# Altium PCB AIRCRAFT.PcbDoc (part 1 of 2)
Units mm, origin at the board's own origin, x right, y up, seen from the top; angles counter-clockwise.
Board outline 152.4 x 101.6 mm, 2 copper layers (Top Layer, Bottom Layer); 97 components, 77 nets, 515 pads, 0 vias.
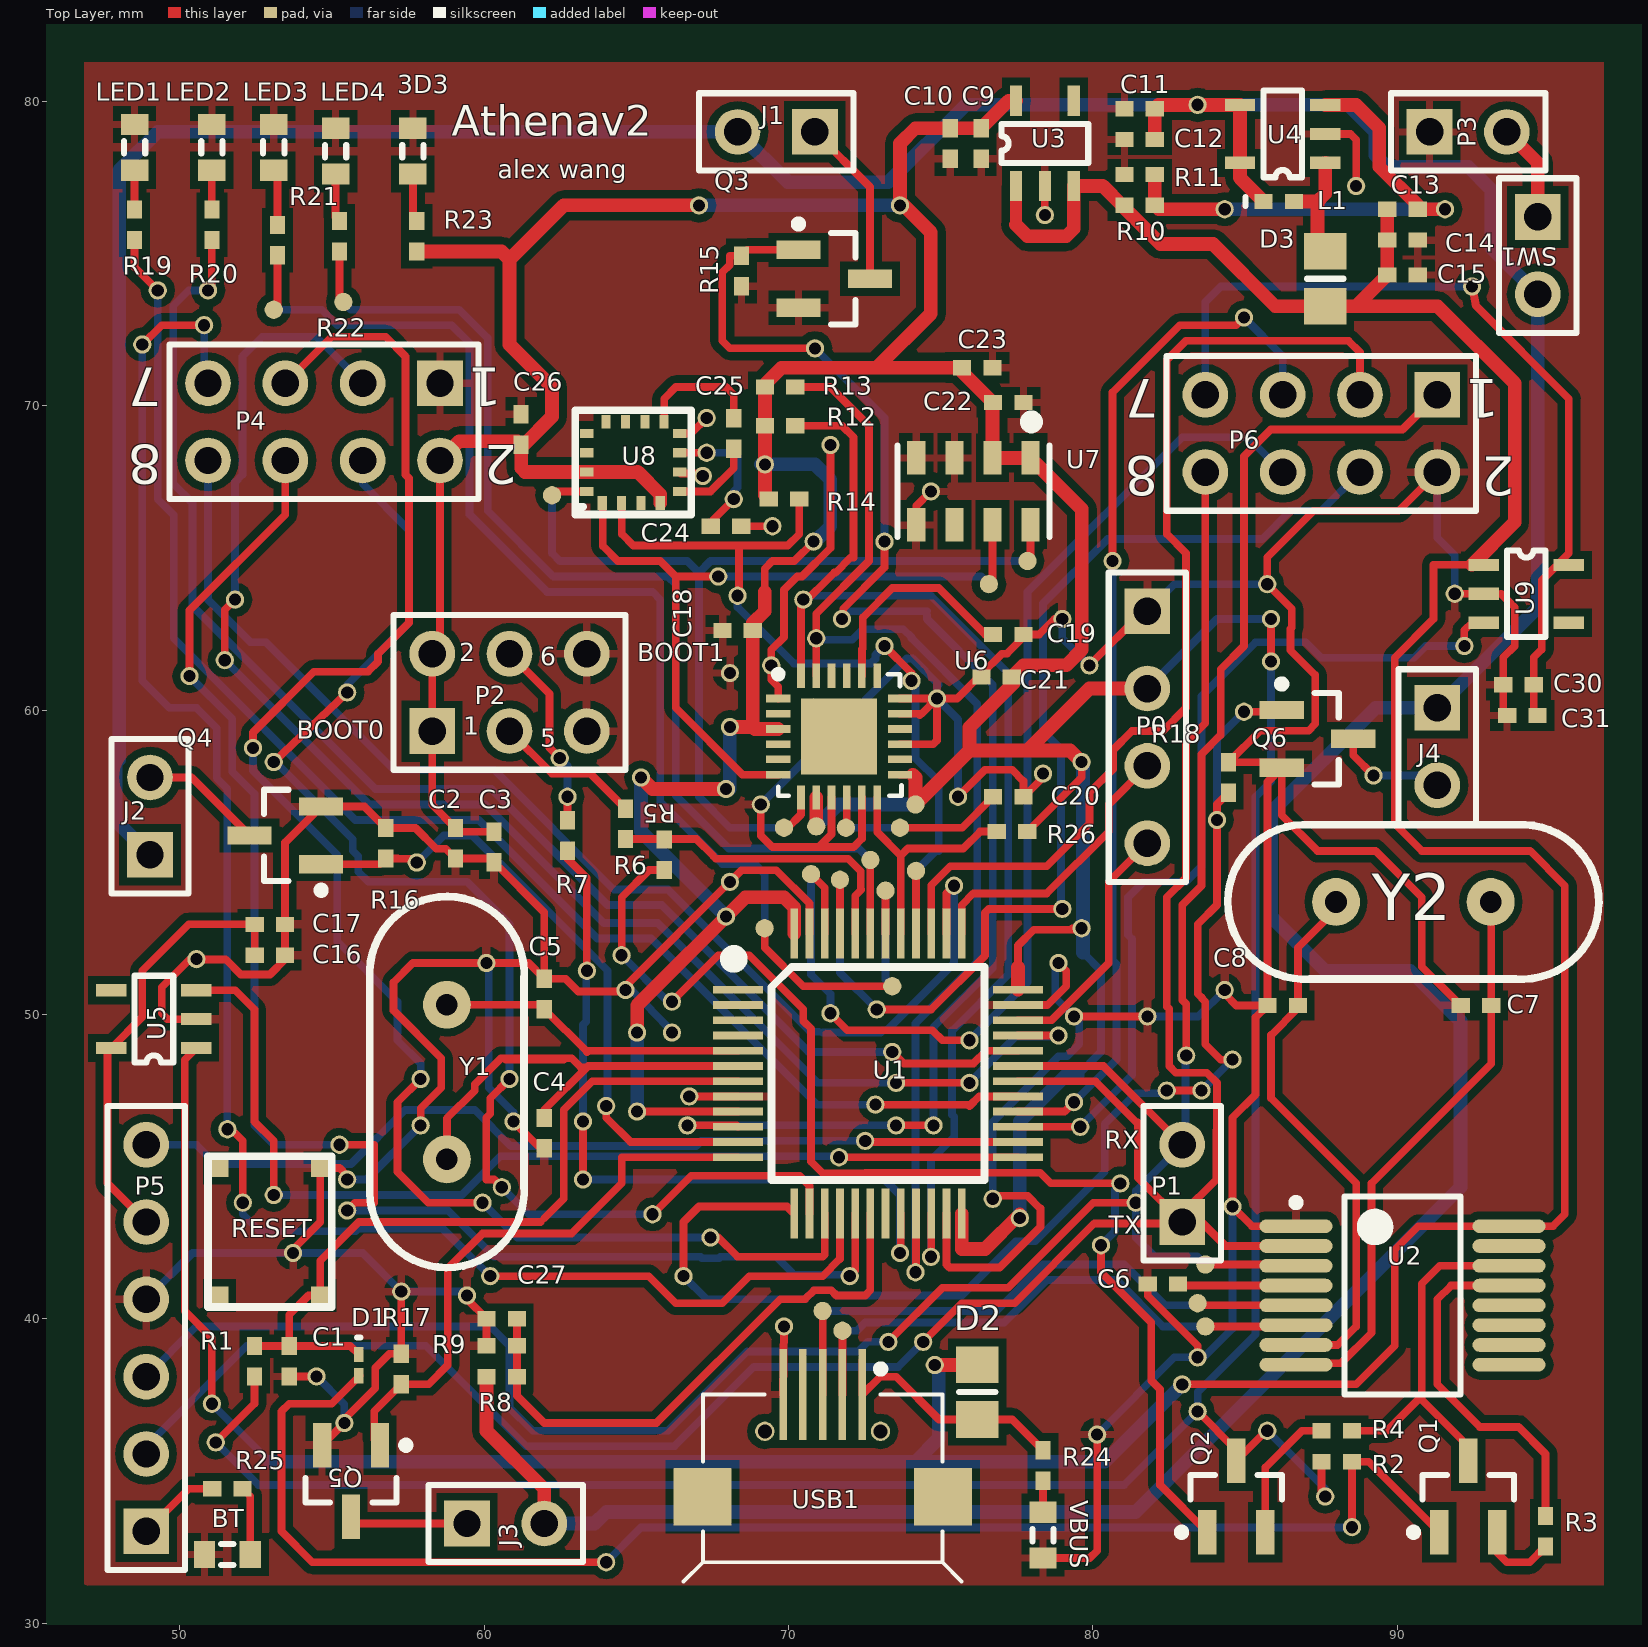
[diagram p0: Top Layer view]
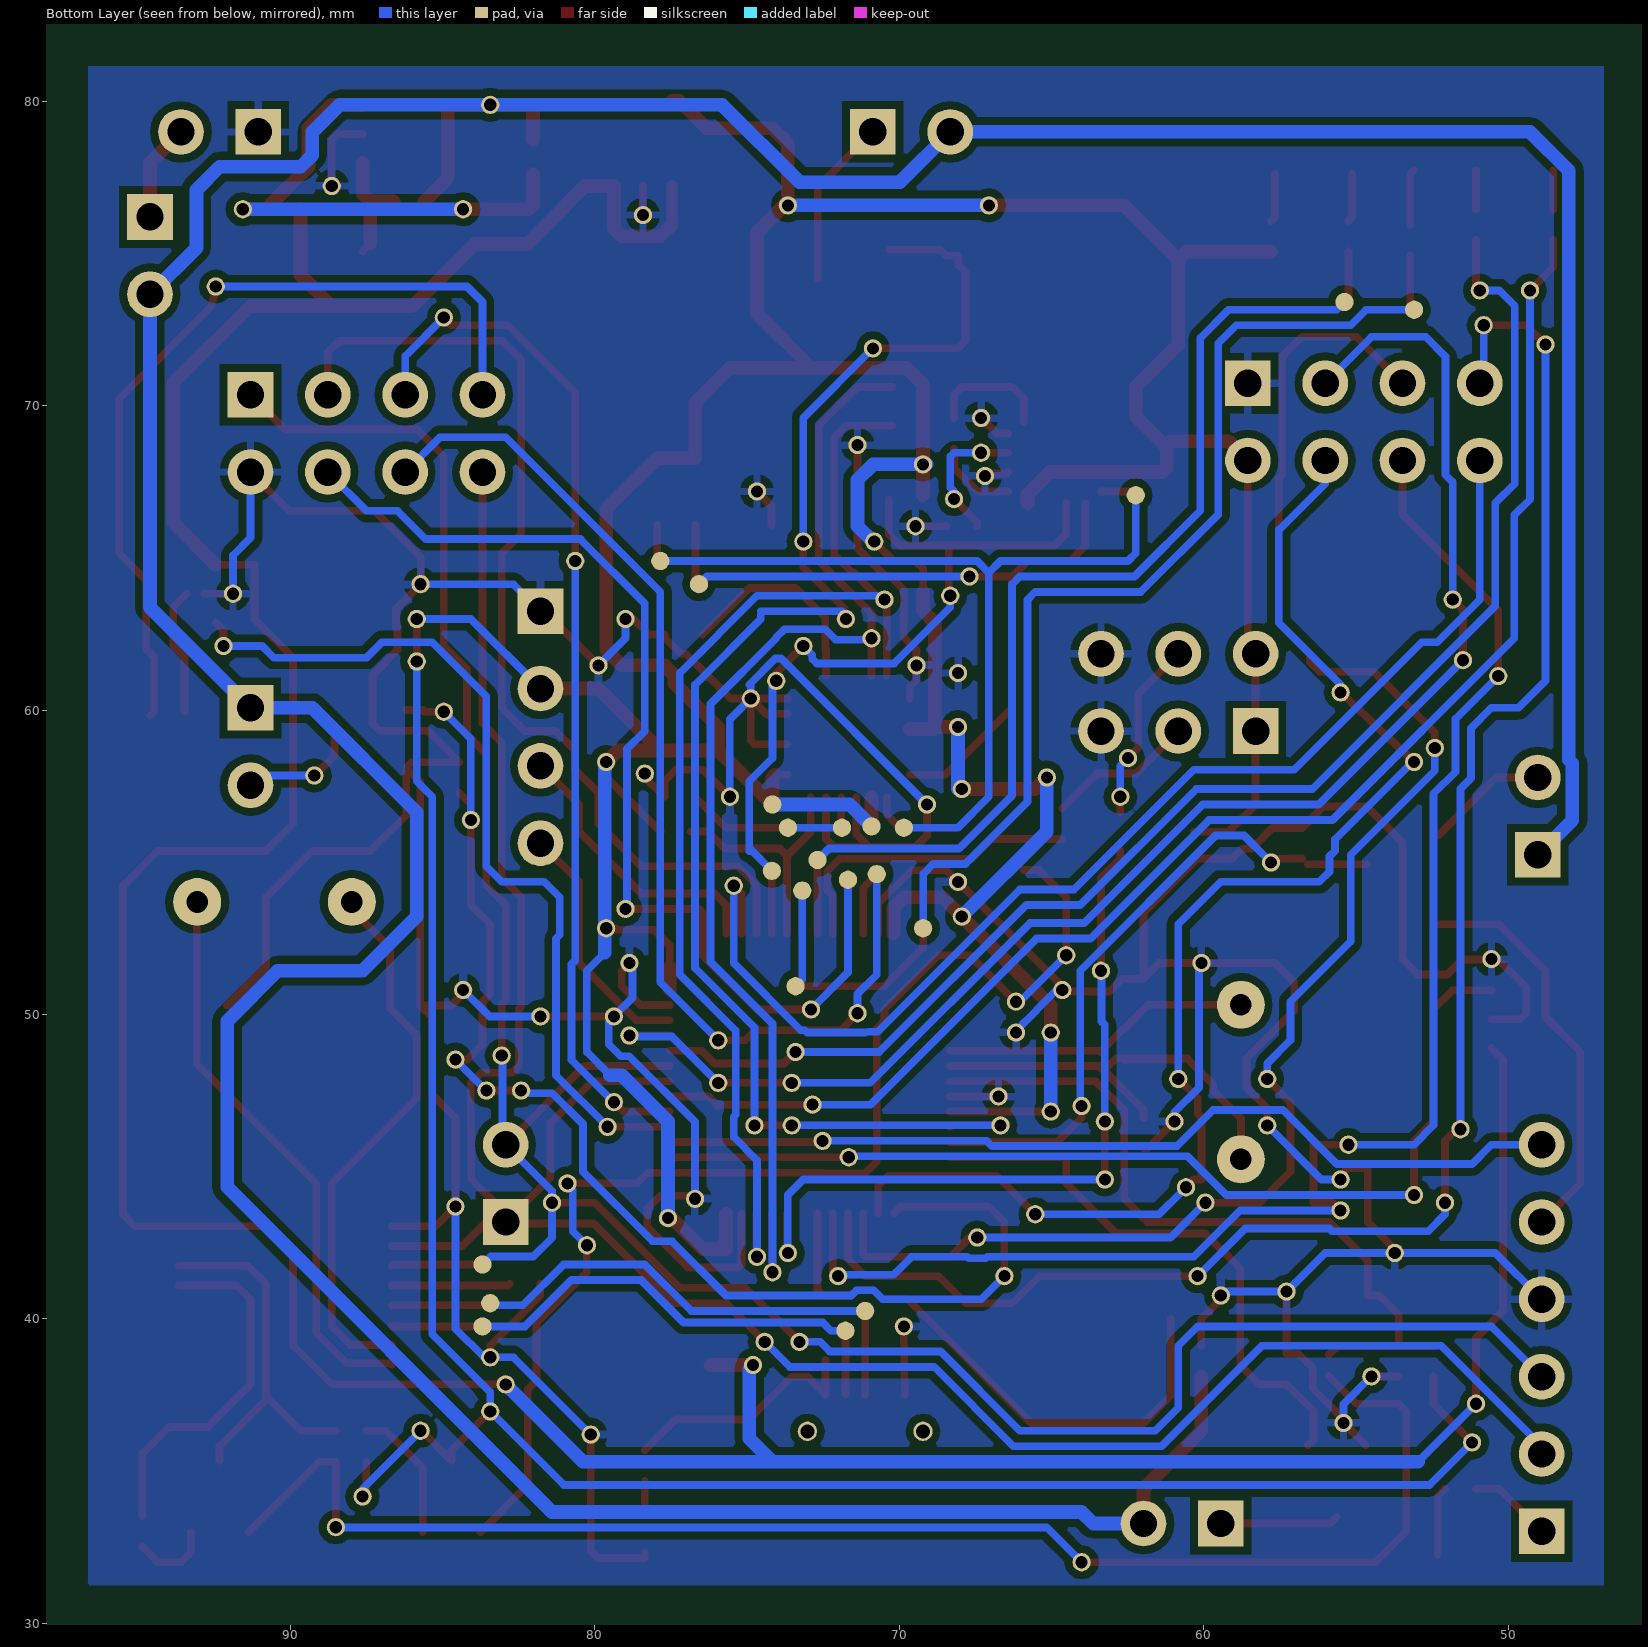
[diagram p1: Bottom Layer view, seen from below]

## Layer stack, top to bottom
Top Layer: signal copper 0.0356
Dielectric: dielectric 0.32, FR-4, Dk 4.8
Bottom Layer: signal copper 0.0356

## Board outline
25.4,25.4 177.8,25.4 177.8,127 25.4,127

## Design rules (kind name [scope] priority, off if disabled: settings)
Clearance [All] p1: gap=0.254
PolygonConnect [All] p1: connectstyle=Relief reliefconductorwidth=0.254 reliefentries=4 polygonreliefangle="90 Angle"
RoomDefinition 07_Wireless [InComponentClass('07_Wireless')] p1: confinementstyle=ConfineIn formatcopy=TRUE lockcomponents=FALSE outline 178.943,80.899 201.295,80.899 201.295,99.187 178.943,99.187
RoomDefinition 06_LEDs [InComponentClass('06_LEDs')] p2: confinementstyle=ConfineIn formatcopy=TRUE lockcomponents=FALSE outline 178.943,74.295 269.367,74.295 269.367,79.629 178.943,79.629
RoomDefinition 05_Motor [InComponentClass('05_Motor')] p3: confinementstyle=ConfineIn formatcopy=TRUE lockcomponents=FALSE outline 178.943,64.897 242.189,64.897 242.189,73.025 178.943,73.025
RoomDefinition 04_Sensor [InComponentClass('04_Sensor')] p4: confinementstyle=ConfineIn formatcopy=TRUE lockcomponents=FALSE outline 178.435,56.777 263.144,56.777 263.144,64.905 178.435,64.905
RoomDefinition 03_Power [InComponentClass('03_Power')] p5: confinementstyle=ConfineIn formatcopy=TRUE lockcomponents=FALSE outline 178.943,43.561 324.866,43.561 324.866,54.229 178.943,54.229
RoomDefinition 02_MCU [InComponentClass('02_MCU')] p6: confinementstyle=ConfineIn formatcopy=TRUE lockcomponents=FALSE outline 180.204,27.038 336.541,27.038 336.541,42.405 180.204,42.405
RoutingVias [All] p1: holewidth=0.711 width=1.27 viastyle="Through Hole" minholewidth=0.711 minwidth=1.27 maxholewidth=0.711 maxwidth=1.27
SilkscreenOverComponentPads [All] p1: minsilkscreentomaskgap=0.254
SolderMaskExpansion [All] p1: expansion=0.102
Width [All] p1: maxlimit=0.254 minlimit=0.254 preferedwidth=0.254
27 further rules are at their usual default settings.

## Classes and differential pairs
component class 07_Wireless: C26 P4 P5 P6
component class 06_LEDs: 3D3 BT LED1 LED2 LED3 LED4 R19 R20 R21 R22 R23 R24 R25 VBUS
component class 05_Motor: J1 J2 J3 J4 Q3 Q4 Q5 Q6 R15 R16 R17 R18
component class 04_Sensor: C18 C19 C20 C21 C22 C23 C24 C25 R12 R13 R14 R26 U6 U7 U8
component class 03_Power: C9 C10 C11 C12 C13 C14 C15 C16 C17 C27 C30 C31 D3 L1 P3 R8 R9 R10 R11 SW1 U3 U4 U5 U9
component class 02_MCU: C1 C2 C3 C4 C5 C6 C7 C8 D1 D2 P0 P1 P2 Q1 Q2 R1 R2 R3 R4 R5 R6 R7 RESET U1 U2 USB1 Y1 Y2

## Components (designator, comment, footprint, x,y, rotation, side; value= is the part's Value field where it differs from the comment)
3D3 "LED0" J1-0603 57.658,78.359 r90 top (schematic designator LED5)
BT "LED0" J1-0603 51.562,32.258 r180 top (schematic designator LED7)
C1 "Cap" 0402 53.594,38.608 r270 top
C2 "Cap" 0402 59.055,55.626 r270 top
C3 "Cap" 0402 60.325,55.499 r270 top
C4 "Cap" 0402 61.976,46.101 r270 top
C5 "Cap" 0402 61.976,50.673 r270 top
C6 "Cap" 0402 82.296,41.148 r0 top
C7 "Cap" 0402 92.583,50.292 r180 top
C8 "Cap" 0402 86.233,50.292 r0 top
C9 "Cap" 0402 76.327,78.613 r270 top
C10 "Cap" 0402 75.311,78.613 r270 top
C11 "Cap" 0402 81.534,79.756 r180 top
C12 "Cap" 0402 81.534,78.74 r180 top
C13 "Cap" 0402 90.17,76.454 r0 top
C14 "Cap" 0402 90.17,75.438 r0 top
C15 "Cap" 0402 90.17,74.295 r0 top
C16 "Cap" 0402 52.959,51.943 r0 top
C17 "Cap" 0402 52.959,52.959 r0 top
C18 "Cap" 0402 68.326,62.611 r180 top
C19 "Cap" 0402 77.216,62.484 r0 top
C20 "Cap" 0402 77.216,57.15 r180 top
C21 "Cap" 0402 76.835,61.087 r0 top
C22 "Cap" 0402 77.216,70.104 r180 top
C23 "Cap" 0402 76.2,71.247 r180 top
C24 "Cap" 0402 67.945,66.04 r180 top
C25 "Cap" 0402 68.199,69.088 r90 top
C26 "Cap" 0402 61.214,69.215 r270 top
C27 "Cap" 0402 60.579,40.005 r0 top
C30 "Cap" 0402 93.98,60.833 r180 top
C31 "Cap" 0402 94.107,59.817 r180 top
D1 "1N4148" 0603 55.88,38.481 r270 top
D2 "MBR0520" 6-0805_N 76.2,37.592 r90 top
D3 "MBR0520" 6-0805_N 87.63,74.168 r270 top
J1 "Header 2" HDR1X2 70.866,78.994 r180 top
J2 "Header 2" HDR1X2 49.022,55.245 r90 top
J3 "Header 2" HDR1X2 59.436,33.274 r0 top
J4 "Header 2" HDR1X2 91.313,60.071 r270 top
L1 "Inductor" 0402-A 86.106,76.708 r0 top
LED1 "LED0" J1-0603 48.514,78.486 r90 top
LED2 "LED0" J1-0603 51.054,78.486 r90 top
LED3 "LED0" J1-0603 53.086,78.486 r90 top
LED4 "LED0" J1-0603 55.118,78.359 r90 top
P0 "Header 4" HDR1X4 81.788,63.246 r270 top
P1 "Header 2" HDR1X2 82.931,43.18 r90 top
P2 "Header 3X2" HDR2X3 58.293,59.309 r0 top
P3 "battery" HDR1X2 91.059,78.994 r0 top
P4 "Header 4X2" HDR2X4 58.547,70.739 r180 top
P5 "Header 6" HDR1X6 48.895,33.02 r90 top
P6 "Header 4X2" HDR2X4 91.313,70.358 r180 top
Q1 "NPNS8050" SOT-23_M 92.329,34.163 r90 top
Q2 "PNPS8550" SOT-23_M 84.709,34.163 r90 top
Q3 "SI2302" SOT-23_M 71.501,74.168 r0 top
Q4 "SI2302" SOT-23_M 53.467,55.88 r180 top
Q5 "SI2302" SOT-23_M 55.626,34.671 r270 top
Q6 "SI2302" SOT-23_M 87.376,59.055 r0 top
R1 "Res3" 0402 52.451,38.608 r270 top
R2 "Res3" 0402 88.011,35.306 r180 top
R3 "Res3" 0402 94.869,33.02 r270 top
R4 "Res3" 0402 88.011,36.322 r180 top
R5 "Res3" 0402 65.913,55.245 r90 top
R6 "Res3" 0402 64.643,56.261 r270 top
R7 "Res3" 0402 62.738,55.88 r90 top
R8 "Res3" 0402 60.579,38.1 r0 top
R9 "Res3" 0402 60.579,39.116 r180 top
R10 "Res3" 0402 81.534,76.581 r180 top
R11 "Res3" 0402 81.534,77.597 r0 top
R12 "Res3" 0402 69.723,69.342 r180 top
R13 "Res3" 0402 69.723,70.612 r180 top
R14 "Res3" 0402 69.85,66.929 r180 top
R15 "Res3" 0402 68.453,74.422 r90 top
R16 "Res3" 0402 56.769,55.626 r270 top
R17 "Res3" 0402 57.277,38.354 r270 top
R18 "Res3" 0402 84.455,57.785 r270 top
R19 "Res3" 0402 48.514,75.946 r270 top
R20 "Res3" 0402 51.054,75.946 r270 top
R21 "Res3" 0402 53.213,75.438 r270 top
R22 "Res3" 0402 55.245,75.565 r270 top
R23 "Res3" 0402 57.785,75.565 r270 top
R24 "Res3" 0402 78.359,35.179 r90 top
R25 "Res3" 0402 51.562,34.417 r180 top
R26 "Res3" 0402 77.343,56.007 r180 top
RESET "SW-PB" SWFOOT 52.959,42.545 r180 top
SW1 "sw" HDR1X2 94.615,76.2 r270 top
U1 "STM32F103" LQFP48S 68.326,50.8 r0 top
U2 "CH340G" SSOP16_M 90.17,40.767 r0 top
U3 "MIC5205" SOT25-5 77.47,77.216 r90 top
U4 "LM27313" SOT25-5 87.63,77.978 r180 top
U5 "MIC5205" SOT25-5 50.546,48.895 r180 top
U6 "MPU6050" QFN24 73.66,58.928 r0 top
U7 "MS5611" "MS5611 - duplicate" 76.073,67.183 r270 top
U8 "HWC5883L" HMC5883L 64.77,68.072 r180 top
U9 "MIC5205" SOT25-5 92.837,64.77 r0 top
USB1 "Micro USB" Micro_USB 71.12,32.004 r270 top
VBUS "LED0" J1-0603 78.359,32.893 r270 top (schematic designator LED6)
Y1 "8MXTAL" XTAL2 58.928,48.006 r90 top
Y2 "12MXTAL" XTAL2 90.297,53.848 r180 top

## Footprints (in the part's own frame and the unit in brackets; to place one, negate y for a bottom-side part, rotate by r counter-clockwise, add the part's x,y. Pads: shape width x height; smd on the part's side, far side on the other; paste and mask are expansions set on the pad)
6-0805_N [mm] "Chip Resistor, Body 2.0x1.2mm, IPC Medium Density"
  rect 1.2x1.4 smd: 1(-0.9,0) 2(0.9,0)
  silkscreen extent 0,-0.6 0,0.6, body extent -1.07,-0.7 1.07,0.7, height 0.7
0402 [mm] "Chip Capacitor, Body 1.0x0.5mm, IPC High Density"
  rect 0.6x0.5 smd: 1(-0.5,0) 2(0.5,0)
  body extent -0.55,-0.3 0.55,0.3, height 1.3
0402-A [mm] "Chip Inductor, Body 1.0x0.5mm, IPC High Density"
  rect 0.6x0.5 smd: 1(-0.5,0) 2(0.5,0)
  silkscreen extent -1.1,-0.15 -1.1,0.15, body extent -0.55,-0.3 0.55,0.3, height 0.55
0603 [mm] "Chip Inductor, Body 0.6x0.3mm, IPC High Density"
  rect 0.5x0.3 smd: 1(-0.35,0) 2(0.35,0)
  silkscreen extent -0.9,-0.05 -0.9,0.05, body extent -0.33,-0.18 0.33,0.18, height 0.55
HDR1X2 [mm] "Connector; Header; 2 Position"
  rect 1.5x1.5 hole 0.9: 1(0,0)
  round 1.5 hole 0.9: 2(2.54,0)
  silkscreen extent -1.27,-1.27 3.81,1.27
HDR1X4 [mm] "Connector; Header; 4 Position"
  rect 1.5x1.5 hole 0.9: 1(0,0)
  round 1.5 hole 0.9: 2(2.54,0) 3(5.08,0) 4(7.62,0)
  silkscreen extent -1.27,-1.27 8.89,1.27
HDR1X6 [mm] "Connector; Header; 6 Position"
  rect 1.5x1.5 hole 0.9: 1(0,0)
  round 1.5 hole 0.9: 2(2.54,0) 3(5.08,0) 4(7.62,0) 5(10.16,0) 6(12.7,0)
  silkscreen extent -1.27,-1.27 13.97,1.27
HDR2X3 [mm] "Connector; Header; 3x2 Position"
  rect 1.5x1.5 hole 0.9: 1(0,0)
  round 1.5 hole 0.9: 2(0,2.54) 3(2.54,0) 4(2.54,2.54) 5(5.08,0) 6(5.08,2.54)
  silkscreen extent -1.27,-1.27 6.35,3.81
HDR2X4 [mm] "Connector; Header; 4x2 Position"
  rect 1.5x1.5 hole 0.9: 1(0,0)
  round 1.5 hole 0.9: 2(0,2.54) 3(2.54,0) 4(2.54,2.54) 5(5.08,0) 6(5.08,2.54) 7(7.62,0) 8(7.62,2.54)
  silkscreen extent -1.27,-1.27 8.89,3.81
HMC5883L [mm]
  rect 0.45x0.3 smd: 1(1.397,0.889) 2(1.397,0.254) 3(1.397,-0.381) 4(1.397,-1.016) 9(-1.651,-1.016) 10(-1.651,-0.381) 11(-1.651,0.254) 12(-1.651,0.889)
  rect 0.3x0.45 smd: 5(0.762,-1.397) 6(0.127,-1.397) 7(-0.508,-1.397) 8(-1.143,-1.397) 13(-1.016,1.27) 14(-0.381,1.27) 15(0.254,1.27) 16(0.889,1.27)
  silkscreen extent -2.03,-1.78 1.78,1.65
J1-0603 [mm] "Chip Resistor, Body 1.6x0.8mm, IPC High Density"
  rect 0.7x0.9 smd: 1(-0.75,0) 2(0.75,0)
  silkscreen extent -0.2,-0.35 0.2,0.35, body extent -0.85,-0.48 0.85,0.48, height 0.9
LQFP48S [mil] "DPIN-0.5"
  rect 65x10 smd: 1(0.42,0.29) 2(0.42,-19.39) 3(0.42,-39.08) 4(0.42,-58.76) 5(0.42,-78.45) 6(0.42,-98.13) 7(0.42,-117.82) 8(0.42,-137.5) 9(0.42,-157.19) 10(0.42,-176.87) 11(0.42,-196.56) 12(0.42,-216.24) 25(362.63,-216.24) 26(362.63,-196.56) 27(362.63,-176.87) 28(362.63,-157.19) 29(362.63,-137.5) 30(362.63,-117.82) 31(362.63,-98.13) 32(362.63,-78.45) 33(362.63,-58.76) 34(362.63,-39.08) 35(362.63,-19.39) 36(362.63,0.29)
  rect 10x65 smd: 13(73.26,-289.08) 14(92.94,-289.08) 15(112.63,-289.08) 16(132.31,-289.08) 17(152,-289.08) 18(171.68,-289.08) 19(191.37,-289.08) 20(211.05,-289.08) 21(230.74,-289.08) 22(250.42,-289.08) 23(270.11,-289.08) 24(289.79,-289.08) 37(289.79,73.13) 38(270.11,73.13) 39(250.42,73.13) 40(230.74,73.13) 41(211.05,73.13) 42(191.37,73.13) 43(171.68,73.13) 44(152,73.13) 45(132.31,73.13) 46(112.63,73.13) 47(92.94,73.13) 48(73.26,73.13)
  silkscreen extent -10,-246 319,46
Micro_USB [mm] "5P Мщ?"
  rect 3x0.25 smd: 1(-5.508,1.3) 2(-5.508,0.65) 3(-5.508,0) 4(-5.508,-0.65) 5(-5.508,-1.3)
  round 0.635 hole 0.457 unplated: MH1(-4.3,1.9) MH2(-4.3,-1.9)
  rect 1.9x1.9 smd: ""(-2.15,3.95) ""(-2.15,-3.95)
  silkscreen extent -6.47,-4.57 0.63,4.57
"MS5611 - duplicate" [mm]
  rect 1.1x0.6 smd: 1(-1.1,1.875) 2(-1.1,0.625) 3(-1.1,-0.625) 4(-1.1,-1.875) 5(1.1,-1.875) 6(1.1,-0.625) 7(1.1,0.625) 8(1.1,1.875)
  silkscreen extent -2.41,-2.5 1.5,2.5
QFN24 [mm] "QFN24"
  rect 0.8x0.25 smd: 1(-4,1.45) 2(-4,0.95) 3(-4,0.45) 4(-4,-0.05) 5(-4,-0.55) 6(-4,-1.05) 13(0,-1.05) 14(0,-0.55) 15(0,-0.05) 16(0,0.45) 17(0,0.95) 18(0,1.45)
  rect 0.25x0.8 smd: 7(-3.25,-1.8) 8(-2.75,-1.8) 9(-2.25,-1.8) 10(-1.75,-1.8) 11(-1.25,-1.8) 12(-0.75,-1.8) 19(-0.75,2.2) 20(-1.25,2.2) 21(-1.75,2.2) 22(-2.25,2.2) 23(-2.75,2.2) 24(-3.25,2.2)
  rect 2.5x2.5 smd: 25(-2,0.2)
  silkscreen extent -4.11,-1.75 0.05,2.36
SOT25-5 [mm]
  rect 1x0.4 smd: 1(0,0) 2(0,-0.95) 3(0,-1.9) 4(2.8,-1.9) 5(2.8,0)
  silkscreen extent 0.76,-2.38 2.03,0.48
SOT-23_M [mm] "SOT23, 3-Leads, Body 2.9x1.3mm, Pitch 0.95mm, Lead Span 2.5mm, IPC Low Density"
  rect 1.45x0.6 smd: 1(-1.175,0.95) 2(-1.175,-0.95) 3(1.175,0)
  silkscreen extent -1.3,-1.5 0.7,1.92, body extent -0.7,-1.5 0.7,1.5, height 1.1
SSOP16_M [mm] "SOP, 16-Leads, Body 6.2x5.3mm, Pitch 0.65mm, IPC Low Density"
  oval 2.4x0.45 smd: 1(-3.5,2.275) 2(-3.5,1.625) 3(-3.5,0.975) 4(-3.5,0.325) 5(-3.5,-0.325) 6(-3.5,-0.975) 7(-3.5,-1.625) 8(-3.5,-2.275) 9(3.5,-2.275) 10(3.5,-1.625) 11(3.5,-0.975) 12(3.5,-0.325) 13(3.5,0.325) 14(3.5,0.975) 15(3.5,1.625) 16(3.5,2.275)
  silkscreen extent -3.62,-3.25 1.9,3.25, body extent -2.7,-3.25 2.7,3.25, height 2
SWFOOT [mm]
  rect 0.6x0.6 smd: 1(-1.651,1.778) 2(-1.651,-2.413) 3(1.651,-2.413) 4(1.651,1.778)
  silkscreen extent -2.03,-2.79 2.03,2.16
XTAL2 [mil]
  round 62 hole 28: 1(91,6) 2(-109,6)
  silkscreen extent -249,-94 231,106

## Part data
3D3 BT LED1 LED2 LED3 LED4 VBUS: "Typical INFRARED GaAs LED"
C1 C2 C3 C4 C5 C6 C7 C8 C9 C10 C11 C12 C13 C14 C15 C16 C17 C18 C19 C20 C21 C22 C23 C24 C25 C26 C27 C30 C31: "Capacitor"
D1: library part "Diode 1N4148", "High Conductance Fast Diode"
D2 D3: library part "D Zener", "Zener Diode"
J1 J2 J3 J4 P1: "Header, 2-Pin"
P0: "Header, 4-Pin"
P2: "Header, 3-Pin, Dual row"
P3 SW1: library part "Header 2", "Header, 2-Pin"
P4 P6: "Header, 4-Pin, Dual row"
P5: "Header, 6-Pin"
Q1: library part NPN, "NPN Bipolar Transistor"
Q2: library part PNP, "PNP Bipolar Transistor"
R1 R2 R3 R4 R5 R6 R7 R8 R9 R10 R11 R12 R13 R14 R15 R16 R17 R18 R19 R20 R21 R22 R23 R24 R25 R26: "Resistor"
RESET: "Switch"
U8: library part HMC5883L
Y1 Y2: library part XTAL, "Crystal Oscillator"

## Free pads (board coordinates)
  round 0.6 hole 0.4: 0(67.31,68.453) 0(79.629,58.293) 0(80.264,42.418) 1(68.199,66.929) 1(79.629,52.832) 1(80.899,44.45) 1(83.439,79.883) 2(64.516,51.943) 2(69.469,66.04) 2(88.646,77.216) 3(66.167,50.419) 3(69.223,68.072) 3(73.406,48.768) 3(91.567,76.454) 4(70.822,65.532) 4(78.867,49.307) 4(84.328,76.454) 4(85.725,36.322) 5(67.691,64.389) 5(75.946,47.752) 5(78.42,76.261) 5(87.63,34.163) 6(68.326,63.754) 6(73.533,47.752) 6(85.852,62.992) 6(92.456,73.914) 7(51.479,61.639) 7(67.056,76.581) 7(69.088,56.896) 7(89.218,57.848) 8(51.816,63.627) 8(73.66,76.581) 8(85.852,61.595) 9(50.927,73.787) 9(67.183,67.691) 9(83.439,36.957) 10(67.31,69.596) 10(88.511,33.155) 11(70.866,71.882) 11(72.852,47.036) 12(49.276,73.787) 12(64.008,32.004) 12(73.152,65.532) 13(51.181,35.941) 13(70.485,63.627) 13(79.375,47.117) 14(70.91,62.357) 14(80.645,64.897) 15(71.755,62.992) 15(83.439,38.735) 16(75.438,54.229) 16(84.963,72.898) 17(79.581,46.307) 18(68.072,54.356) 18(92.202,62.103) 19(74.041,60.96) 19(83.063,48.646) 20(62.738,57.15) 21(62.484,58.42) 21(73.152,62.103) 22(78.867,51.689) 22(84.582,48.514) 23(66.738,47.307) 23(72.898,50.165) 23(78.359,57.912) 24(66.675,46.355) 24(71.374,50.038) 25(77.597,43.307) 25(84.074,56.388) 26(74.759,46.355) 26(76.708,43.942) 26(84.963,59.944) 27(74.676,42.037) 27(85.725,64.135) 28(73.533,46.355) 28(74.168,41.529) 28(78.994,62.992) 29(72.517,45.847) 29(75.946,49.149) 29(79.883,61.468) 30(71.66,45.307) 30(78.994,53.467) 30(84.582,43.688) 31(53.086,44.069) 31(55.406,36.576) 32(54.491,38.108) 32(65.024,49.403) 33(71.374,68.707) 34(60.96,46.482) 34(65.024,46.807) 36(64.643,50.8) 37(79.375,49.935) 38(73.66,42.164) 38(81.788,49.935) 39(63.246,44.577) 39(83.566,47.498) 40(63.246,46.482) 40(82.423,47.498) 41(63.373,51.435) 41(84.328,50.8) 42(68.072,59.444) 42(80.137,36.195) 43(67.945,57.404) 43(69.85,39.751) 44(50.546,51.816) 44(65.151,57.785) 45(59.436,40.767) 45(67.945,53.213) 46(57.277,40.894) 46(64.008,46.99) 47(53.721,42.164) 47(57.785,54.991) 48(60.071,51.689) 48(72.009,41.402) 49(55.499,44.577) 49(65.532,43.434) 50(57.912,46.355) 50(60.579,44.323) 51(60.833,47.879) 52(53.086,58.293) 52(66.167,49.403) 53(55.499,60.579) 54(67.437,42.672) 55(59.944,43.815) 56(57.912,47.879) 57(52.405,58.755) 58(55.499,43.561) 59(55.245,45.72) 60(50.32,61.115) 61(60.198,41.402) 62(52.07,43.815) 63(51.562,46.228) 64(48.768,72.009) 65(50.8,72.644) 66(66.548,41.402) 68(82.931,37.846) 69(74.803,38.481) 70(73.279,39.243) 71(81.407,43.815) 72(74.422,39.243) 73(51.054,37.211) 75(91.887,63.82) 76(74.877,60.378) 77(74.676,67.183) 78(75.565,57.15) 80(68.072,61.214) 81(69.432,61.468)
  round 0.6 all layers, no hole: 0(83.693,41.783) 1(83.439,40.513) 2(71.12,40.259) 3(71.77,39.609) 4(83.693,39.751) 7(69.85,56.134) 8(62.23,67.056) 9(77.851,64.897) 10(76.581,64.135) 11(70.739,54.61) 13(71.687,54.424) 14(70.91,56.178) 15(71.882,56.134) 16(73.66,56.134) 17(74.168,56.896) 18(74.187,54.718) 19(72.687,55.075) 21(73.187,54.067) 22(55.372,73.406) 23(73.406,50.927) 24(69.215,52.832) 25(53.086,73.152)

## Nets (pads, with @x,y where several pads share a name; then routed paths per layer and width w, separated by ;. In a path a pad name is that pad's centre, name@x,y a point inside that pad or via, vN(x,y) a via of type N, cw(c..) or ccw(c..) an arc to the next point about the centre after c; other vN are vias at no path point)
BAT_DET: C27.2 R8.2 R9.1 U1.18 | length 19
  Top Layer w0.254: C27.2@61.079,40.005 R8.2@61.079,38.1 61.079,37.473 61.976,36.576 65.659,36.576 69.723,40.64 70.538,40.64 70.838,40.94 71.402,40.94 71.575,40.767 72.517,40.767 72.687,40.937 U1.18@72.687,43.457
BOOT0: R5.2 R6.2 U1.44 | length 10.2
  Top Layer w0.254: R6.2@64.643,55.761 65.913,55.761 66.974,55.761 67.527,55.208 ; 67.617,55.118 71.956,55.118 72.368,54.706 72.368,54.124 72.39,54.102 72.187,53.899 U1.44@72.187,52.657
BOOT1: pad.38@73.66,42.164 pad.39@63.246,44.577 pad.40@63.246,46.482 pad.41@63.373,51.435 R7.1 U1.20 | length 24.9
  Top Layer w0.254: R7.1@62.738,55.38 62.738,55.118 63.373,54.483 pad.41@63.373,51.435 ; pad.39@63.246,44.577 pad.40@63.246,46.482 ; pad.38@73.687,42.191 U1.20@73.687,43.457
  Bottom Layer w0.254: pad.39@63.246,44.577 73.152,44.577 73.66,44.069 pad.38@73.66,42.164 ; pad.40@63.246,46.482 63.246,49.657 63.355,49.766 pad.41@63.355,51.417
BT_EN: pad.30@71.66,45.307 pad.31@53.086,44.069 U1.25 U5.3 | length 33.5
  Top Layer w0.254: U5.3@50.546,50.795 51.821,50.795 52.451,50.165 52.451,46.482 53.086,45.847 pad.31@53.086,44.069 ; pad.30@71.66,45.307 U1.25@77.537,45.307
  Bottom Layer w0.254: pad.31@53.086,44.069 59.26,44.069 60.53,45.339 pad.30@71.628,45.339
DN: pad.3@71.77,39.609 pad.4@83.693,39.751 U2.6 USB1.2 | length 18.3
  Top Layer w0.254: USB1.2@71.77,37.512 pad.3@71.77,39.609 ; pad.4@83.693,39.751 86.629,39.751 U2.6@86.67,39.792
  Bottom Layer w0.254: pad.3@71.77,39.609 72.248,39.609 72.517,39.878 77.089,39.878 78.486,41.275 80.772,41.275 82.296,39.751 pad.4@83.693,39.751
DP: pad.1@83.439,40.513 pad.2@71.12,40.259 U2.5 USB1.3 | length 19.6
  Top Layer w0.254: USB1.3@71.12,37.512 pad.2@71.12,40.386 ; pad.1@83.439,40.442 U2.5@86.67,40.442
  Bottom Layer w0.254: pad.2@71.12,40.259 76.835,40.259 78.359,41.783 81.026,41.783 82.367,40.442 pad.1@83.439,40.442
DTR: R3.1 U2.13 | length 11.9
  Top Layer w0.254: U2.13@93.67,41.092 91.765,41.092 91.313,40.64 91.313,37.846 92.71,36.449 93.98,36.449 94.869,35.56 R3.1@94.869,33.52
GND: 3D3.2 BT.2 C1.2 C2.2 C3.2 C4.2 C5.1 C6.1 C7.2 C8.1 C9.2 C10.2 C11.2 C12.2 C14.2 C15.2 C16.2 C17.2 C18.2 C19.2 C20.1 C21.1 C22.1 C23.1 C24.1 C26.1 C27.1 C30.2 C31.2 LED1.2 LED2.2 LED3.2 LED4.2 P0.1 P2.5 P2.6 P3.1 P4.1 P5.4 P6.2 pad.2@69.469,66.04 pad.2@88.646,77.216 pad.5@78.42,76.261 pad.7@69.088,56.896 pad.9@67.183,67.691 pad.10@67.31,69.596 pad.15@83.439,38.735 pad.18@68.072,54.356 pad.22@78.867,51.689 pad.23@66.738,47.307 pad.23@78.359,57.912 pad.26@76.708,43.942 pad.27@85.725,64.135 pad.28@78.994,62.992 pad.29@79.883,61.468 pad.30@84.582,43.688 pad.31@55.406,36.576 pad.32@54.491,38.108 pad.33 pad.34@60.96,46.482 pad.36 pad.37 pad.38@81.788,49.935 pad.41@84.328,50.8 pad.42@80.137,36.195 pad.43@69.85,39.751 pad.44@50.546,51.816 pad.45@59.436,40.767 pad.46@57.277,40.894 pad.47@53.721,42.164 pad.48@60.071,51.689 pad.49@55.499,44.577 pad.50@57.912,46.355 pad.52@66.167,49.403 pad.75 pad.76 pad.77 pad.78 pad.80 pad.81 Q3.2 Q4.2 Q5.2 Q6.2 R9.2 R11.1 R15.1 R16.1 R17.1 R18.1 RESET.2 U1.8 U1.23 U1.35 U1.47 U2.1 U3.2 U4.2 U5.2 U6.1 U6.9 U6.11 U6.15 U6.17 U6.18 U7.3 U7.4 U7.5 U8.9 U8.11 U9.2 USB1.5 VBUS.2 | length 252.3
  Top Layer w0.254: U5.2@50.546,49.845 49.596,49.845 49.403,50.038 49.403,50.891 50.328,51.816 pad.44@50.546,51.816 50.554,51.808 51.505,51.808 52.001,51.312 52.963,51.312 53.459,51.808 C16.2@53.459,51.943 C17.2@53.459,52.959 53.459,55.647 Q4.2@54.642,56.83 56.065,56.83 R16.1@56.769,56.126 57.743,56.126 58.424,55.445 58.736,55.445 C2.2@59.055,55.126 60.198,55.126 C3.2@60.325,54.999 61.976,53.348 C5.1@61.976,51.173 ; C1.2@53.594,38.108 pad.32@54.491,38.108 ; pad.47@53.721,42.164 53.721,42.291 54.61,43.18 RESET.2@54.61,44.958 55.245,44.958 55.499,44.704 pad.49@55.499,44.577 ; Q5.2@54.676,35.846 pad.31@55.406,36.576 55.406,36.701 56.419,37.714 56.419,38.385 56.888,38.854 R17.1@57.277,38.854 pad.46@57.277,40.894 ; pad.50@57.912,46.355 57.912,46.916 58.593,47.597 58.593,48.56 57.023,50.13 57.023,51.054 57.658,51.689 pad.48@60.071,51.689 61.46,51.689 C5.1@61.976,51.173 ; pad.45@59.436,40.767 59.436,40.648 C27.1@60.079,40.005 R9.2@60.079,39.116 ; pad.34@60.96,46.482 61.841,45.601 C4.2@61.976,45.601 ; U8.11@66.421,67.818 66.467,67.772 67.102,67.772 pad.9@67.183,67.691 ; U8.9@66.421,69.088 66.802,69.088 pad.10@67.31,69.596 ; pad.23@66.738,47.307 U1.8@68.337,47.307 ; C24.1@68.445,66.04 pad.2@69.469,66.04 ; pad.7@69.088,56.642 69.088,55.88 69.469,55.499 70.993,55.499 ; U6.1@69.66,60.378 69.66,60.769 69.432,60.997 69.432,61.976 69.85,62.394 69.85,63.955 70.284,64.389 70.441,64.389 71.374,65.322 pad.33@71.374,68.707 ; USB1.5@69.82,37.512 pad.43@69.85,39.751 pad.43@69.85,39.497 ; U1.47@70.687,52.657 70.687,53.646 69.596,54.737 68.453,54.737 pad.18@68.072,54.356 64.643,50.927 pad.36@64.643,50.8 64.597,50.754 63.091,50.754 62.672,51.173 C5.1@61.976,51.173 ; U6.9@71.41,57.128 71.41,55.916 70.993,55.499 ; U6.11@72.41,57.128 72.41,55.773 72.136,55.499 70.993,55.499 ; U6.15@73.66,58.878 74.753,58.878 74.877,59.002 pad.76@74.877,60.378 ; U6.17@73.66,59.878 74.274,59.878 ; U6.18@73.66,60.378 pad.76@74.877,60.378 ; U7.5@74.198,66.083 74.198,66.705 pad.77@74.676,67.183 ; 74.314,59.838 74.274,59.878 ; U1.23@75.187,43.457 75.187,41.786 75.288,41.685 76.938,41.685 78.278,43.025 78.278,43.633 78.255,43.633 77.848,44.04 76.806,44.04 pad.26@76.708,43.942 ; pad.78@75.565,57.15 76.454,58.039 77.343,58.039 77.716,57.666 C20.1@77.716,57.15 77.724,57.15 pad.23@78.486,57.912 ; C21.1@76.335,61.087 C21.1@76.335,61.176 ; U1.35@77.537,50.307 78.501,50.307 79.121,50.927 79.121,51.435 pad.22@78.867,51.689 ; VBUS.2@78.359,32.304 VBUS.2@78.359,32.143 79.895,32.143 80.137,32.385 pad.42@80.137,36.195 ; pad.5@78.42,76.261 U3.2@78.42,77.216 ; pad.28@78.74,62.992 78.232,62.484 C19.2@77.716,62.484 77.716,62.395 77.174,61.853 77.012,61.853 C21.1@76.335,61.176 ; pad.37@79.375,49.935 pad.38@81.788,49.935 ; pad.29@79.883,61.468 81.661,63.246 P0.1@81.788,63.246 ; C6.1@81.796,41.148 81.796,40.759 83.439,39.116 pad.15@83.439,38.735 ; pad.41@84.328,50.8 84.328,50.673 84.709,50.292 C8.1@85.733,50.292 ; U2.1@86.67,43.042 85.228,43.042 pad.30@84.582,43.688 84.582,46.609 85.344,47.371 85.344,49.903 C8.1@85.733,50.292 ; U4.2@87.63,78.928 88.458,78.928 88.646,78.74 pad.2@88.646,77.216 ; P6.2@91.313,67.818 90.043,66.548 87.249,66.548 85.725,65.024 pad.27@85.725,64.135 86.533,63.327 86.533,62.71 86.487,62.664 86.487,61.969 87.307,61.149 87.307,59.547 87.084,59.324 85.494,59.324 R18.1@84.455,58.285 86.021,58.285 Q6.2@86.201,58.105 ; pad.75@91.887,63.82 U9.2@92.837,63.82 ; C7.2@92.083,50.292 90.805,51.57 90.805,53.848 89.281,55.372 87.376,55.372 86.201,56.547 Q6.2@86.201,58.105 ; 93.406,63.82 93.853,63.373 93.853,62.103 93.48,61.73 C30.2@93.48,60.833 C31.2@93.48,59.944 ; 74.274,59.878 74.377,59.878 pad.76@74.877,60.378 ; pad.76@74.877,60.378 75.537,60.378 C21.1@76.335,61.176 ; C8.1@85.733,50.292 85.733,57.637 Q6.2@86.201,58.105
  Bottom Layer w0.254: P5.4@48.895,40.64 50.419,42.164 pad.47@53.721,42.164 56.007,42.164 pad.46@57.277,40.894 59.309,40.894 pad.45@59.436,40.767 ; pad.32@54.491,38.108 55.406,37.193 pad.31@55.406,36.576 ; pad.49@55.499,44.577 56.134,44.577 pad.50@57.912,46.355 ; pad.48@60.071,51.689 60.152,51.608 60.152,47.597 60.96,46.789 pad.34@60.96,46.482 ; pad.36@64.643,50.8 64.844,50.8 65.486,50.158 65.486,50.137 66.167,49.456 pad.52@66.167,49.403 ; pad.7@69.088,56.896 73.884,61.692 74.071,61.692 74.93,60.833 ; 74.877,60.803 pad.76@74.877,60.378 75.565,59.69 pad.78@75.565,57.15 ; pad.26@76.708,43.942 76.708,46.467 78.867,48.626 79.149,48.626 79.548,49.025 79.548,49.762 pad.37@79.375,49.935 78.764,50.546 78.764,51.586 pad.22@78.867,51.689 ; pad.28@78.994,62.992 78.994,62.357 pad.29@79.883,61.468 ; pad.42@80.137,36.195 82.677,38.735 pad.15@83.439,38.735 83.64,38.735 84.582,39.677 pad.30@84.582,43.688 ; pad.38@81.788,49.935 83.463,49.935 pad.41@84.328,50.8 ; P0.1@81.788,63.246 82.677,64.135 pad.27@85.725,64.135 ; P6.2@91.313,67.818 91.313,65.659 91.887,65.085 pad.75@91.887,63.82
HW_INT: pad.6@68.326,63.754 pad.18@74.187,54.718 pad.19@74.041,60.96 pad.21@73.152,62.103 R14.1 U1.40 U8.15 | length 26.5
  Top Layer w0.254: U8.15@64.516,66.802 64.516,65.786 64.897,65.405 69.977,65.405 70.35,65.778 R14.1@70.35,66.929 ; pad.6@68.326,63.754 68.372,63.8 68.372,65.324 ; pad.21@73.152,62.103 74.041,61.214 pad.19@74.041,60.96 ; pad.18@74.168,54.737 pad.18@74.187,54.718 U1.40@74.187,52.657
  Bottom Layer w0.254: pad.6@68.326,63.754 68.326,63.373 70.168,61.531 72.707,61.531 72.856,61.68 72.856,61.807 pad.21@73.152,62.103 ; pad.19@74.168,60.793 74.168,58.42 74.93,57.658 74.93,55.372 ; pad.18@74.187,54.718 74.885,55.417
I2C_SCL: pad.14@70.91,62.357 pad.28@74.168,41.529 R13.1 U1.21 U6.23 | length 40
  Top Layer w0.254: R13.1@70.223,70.612 71.374,70.612 72.644,69.342 72.644,64.897 70.91,63.163 pad.14@70.91,62.357 U6.23@70.91,61.128 ; pad.28@74.168,41.529 74.187,41.421 U1.21@74.187,43.457
  Bottom Layer w0.254: pad.14@70.91,62.357 70.956,62.311 72.09,62.311 72.436,62.657 73.771,62.657 74.041,62.387 ; 74.041,62.357 76.2,60.198 76.2,51.733 74.168,49.701 pad.28@74.168,41.529
I2C_SDA: pad.13@70.485,63.627 pad.27@74.676,42.037 R12.1 U1.22 U6.24 | length 39.9
  Top Layer w0.254: R12.1@70.223,69.342 71.755,69.342 72.136,68.961 72.136,65.002 ; U6.24@70.41,61.128 70.41,63.425 71.501,64.516 71.545,64.516 72.031,65.002 ; pad.27@74.676,42.037 74.687,42.048 U1.22@74.687,43.457
  Bottom Layer w0.254: pad.13@70.41,63.754 74.676,63.754 77.216,61.214 77.216,51.312 75.373,49.468 75.373,46.705 75.44,46.637 75.44,45.976 74.676,45.212 pad.27@74.676,42.291
LED1: pad.11@72.852,47.036 pad.12@49.276,73.787 R19.2 U1.29 | length 47.9
  Top Layer w0.254: R19.2@48.514,75.446 48.514,74.549 pad.12@49.276,73.787 ; pad.11@72.898,47.082 pad.11@72.852,47.036 75.9,47.036 75.946,46.99 76.263,47.307 U1.29@77.537,47.307
  Bottom Layer w0.254: pad.12@49.276,73.787 49.276,66.929 49.797,66.408 49.797,62.357 55.766,56.388 59.821,56.388 63.714,52.495 65.488,52.495 70.947,47.036 pad.11@72.852,47.036
LED2: pad.3@73.406,48.768 pad.9@50.927,73.787 R20.2 U1.32 | length 46.7
  Top Layer w0.254: pad.9@50.927,73.787 51.054,73.914 R20.2@51.054,75.446 ; pad.3@73.406,48.768 73.787,48.387 76.073,48.387 76.493,48.807 U1.32@77.537,48.807
  Bottom Layer w0.254: pad.9@50.927,73.787 50.292,73.787 49.784,73.279 49.784,67.437 50.419,66.802 50.419,63.417 56.432,57.404 60.242,57.404 64.052,53.594 65.83,53.594 70.656,48.768 pad.3@73.406,48.768
LED3: pad.21@73.187,54.067 pad.23@73.406,50.927 pad.24@69.215,52.832 pad.25@53.086,73.152 R21.2 U1.42 | length 44.6
  Top Layer w0.254: pad.25@53.086,73.152 53.213,73.279 R21.2@53.213,74.938 ; pad.24@69.215,52.832 69.215,52.197 70.485,50.927 pad.23@73.406,50.927 ; U1.42@73.187,52.657 pad.21@73.187,54.067
  Bottom Layer w0.254: pad.25@53.086,73.152 54.663,73.152 55.171,72.644 58.928,72.644 59.521,72.051 59.521,66.423 62.063,63.881 65.532,63.881 65.786,63.627 65.786,56.983 67.824,54.945 68.88,54.945 69.215,54.61 pad.24@69.215,52.832 ; pad.21@73.187,54.067 73.187,51.146 pad.23@73.406,50.927
LED4: pad.19@72.687,55.075 pad.22@55.372,73.406 R22.2 U1.43 | length 36.4
  Top Layer w0.254: R22.2@55.245,75.065 55.245,73.533 pad.22@55.372,73.406 ; U1.43@72.687,52.657 pad.19@72.687,55.075
  Bottom Layer w0.254: pad.22@55.372,73.406 55.626,73.152 59.182,73.152 60.115,72.219 60.115,66.548 62.274,64.389 66.04,64.389 66.294,64.135 66.294,57.194 68.035,55.453 72.309,55.453 pad.19@72.687,55.075
MP_INT: R26.2 U1.41 U6.12 | length 8.3
  Top Layer w0.254: U6.12@72.91,57.128 72.91,55.995 73.687,55.218 ; U1.41@73.687,52.657 73.687,55.218 ; R26.2@76.843,56.007 76.291,56.007 75.737,55.453 73.922,55.453 73.687,55.218
NetC6_2: C6.2 U2.4 | length 3.9
  Top Layer w0.254: C6.2@82.796,41.148 82.852,41.092 U2.4@86.67,41.092
NetC7_1: C7.1 U2.8 Y2.2 | length 18.5
  Top Layer w0.254: U2.8@86.67,38.492 86.714,38.536 88.149,38.536 89.154,39.541 89.154,44.45 93.083,48.379 C7.1@93.083,50.292 Y2.2@93.083,53.459
NetC8_2: C8.2 U2.7 Y2.1 | length 18.3
  Top Layer w0.254: U2.7@86.67,39.142 88.037,39.142 88.646,39.751 88.646,44.45 85.852,47.244 85.852,49.322 86.733,50.203 C8.2@86.733,50.292 86.733,52.189 Y2.1@88.24,53.696